# EAGLE board Carga_con_panel (EAGLE 9.7.0)

Size 262.57 x 170.64 mm. Coordinates in mm from the lower left corner, seen from the top.
Outline: 0,0 262.57,0 262.57,170.64 0,170.64 0,0
Copper layers (1*16): Top 0.035mm / dielectric 1.5mm / Bottom 0.035mm
Design rules "default": minimum track width 6mil, minimum drill 0.35mm, track to track 6mil, track to pad 6mil, pad to pad 6mil, via to via 6mil, smd to smd 6mil, copper to edge 40mil, drill to drill 6mil, minimum pad ring 10mil, minimum via ring 8mil, stop-mask expansion 4mil, vias tented up to drill 0mil, thermal gap 10mil

## Footprints (pad centres in the part's own frame; a part is rotated, then mirrored left to right if it is on the bottom)
CAPPRD254W65D500H1150B = drill 0.85 pad 1.45: 1 -1.27,0; 2 1.27,0
DIODE-AXIAL = drill 1: 1 -5.08,0; 2 5.08,0
LEDRD254W60D565H860B = drill 0.981 pad 1.581: 1 -1.27,0; 2 1.27,0
TO220V = drill 1.016 long: 1 -2.54,-2.54; 2 0,-2.54; 3 2.54,-2.54
RESAD1016W63L850D250B = drill 0.83 pad 1.43: 1 -5.08,0; 2 5.08,0
BATTERY-GENERIC = drill 1.118 pad 3.15 octagon: + 2.54,0; - -2.54,0
LCD-I2C = drill 1.016 long: 1 -19.05,-5.08; 2 -19.05,-7.62; 3 -19.05,-10.16; 4 -19.05,-12.7
ARDUINO-UNO-R3-SHIELD = drill 1.016 pad 1.88: 3.3V 24.13,-2.54; 5V 24.13,0; A0 24.13,12.7; A1 24.13,15.24; A2 24.13,17.78; A3 24.13,20.32; A4 24.13,22.86; A5 24.13,25.4; AREF -24.13,-13.97; D2 -24.13,20.32; D3 -24.13,17.78; D4 -24.13,15.24; D5 -24.13,12.7; D6 -24.13,10.16; D7 -24.13,7.62; D8 -24.13,3.81; D9 -24.13,1.27; D10 -24.13,-1.27; D11 -24.13,-3.81; D12 -24.13,-6.35; D13 -24.13,-8.89; GND@0 24.13,2.54; GND@1 24.13,5.08; GND@2 -24.13,-11.43; IOREF 24.13,-7.62; NC 24.13,-10.16; RES 24.13,-5.08; RX -24.13,25.4; SCL -24.13,-19.05; SDA -24.13,-16.51; TX -24.13,22.86; VIN 24.13,7.62

## Placement (x,y rotation side)
C1  1m  [CAPPRD254W65D500H1150B]  256.84,112.47 180 top
C2  100u  [CAPPRD254W65D500H1150B]  174.1,38.68 0 top
D1  DIODEDIODE-AXIAL  [DIODE-AXIAL]  91.31,158.42 0 top
D2  RED  [LEDRD254W60D565H860B]  203.31,33.6 180 top
Q1  TIP120_TO220-V  [TO220V]  149.57,166.75 0 top
R1  10k  [RESAD1016W63L850D250B]  222.36,51.38 180 top
R2  10k  [RESAD1016W63L850D250B]  212.2,53.92 180 top
R3  100  [RESAD1016W63L850D250B]  166.48,36.14 0 top
R4  1k  [RESAD1016W63L850D250B]  147.03,161.67 90 top
R5  220  [RESAD1016W63L850D250B]  202.04,25.98 90 top
SC1  BATTERYGENERIC  [BATTERY-GENERIC]  8.26,8.26 180 top
U1  LCD-16X2-I2CSUNFOUNDER-IIC  [LCD-I2C]  160.16,121.9 0 top
U2  ARDUINO-UNO-R3-SHIELD  [ARDUINO-UNO-R3-SHIELD]  91.97,54.25 270 top

## Library data of the parts
C1 C2 D1 Q1 R1-R5 SC1 U1 U2 = Tinkercad
D2 = Tinkercad; CATEGORY: Opto-Electronic; SUB-CATEGORY: LED; VALUE: LED_RED

## Nets
D2_C: D2.2 R5.2
Q1_B: Q1.1 R4.2
Q1_C: C1.1 D1.2 Q1.2 R1.1
SC1+: D1.1 R3.1 SC1.+
SC1-: C1.2 C2.2 Q1.3 R2.2 R5.1 SC1.- U1.1 U2.GND@0 U2.GND@1 U2.GND@2
U2_5V: U1.2 U2.5V
U2_A0: R1.2 R2.1 U2.A0
U2_A1: C2.1 R3.2 U2.A1
U2_D8: D2.1 U2.D8
U2_D9: R4.1 U2.D9
U2_SCL: U1.4 U2.SCL
U2_SDA: U1.3 U2.SDA

## Tracks (layer width: path | path; a pad name or v marks a point on that pad's centre or on a via)
D2_C  (1 unrouted)
Q1_B  (1 unrouted)
Q1_C  (3 unrouted)
SC1+  (2 unrouted)
SC1-  (9 unrouted)
U2_5V  (1 unrouted)
U2_A0  (2 unrouted)
U2_A1  (2 unrouted)
U2_D8  (1 unrouted)
U2_D9  (1 unrouted)
U2_SCL  (1 unrouted)
U2_SDA  (1 unrouted)